# Altium PCB main.PcbDoc
Units mm, origin at the board's own origin, x right, y up, seen from the top; angles counter-clockwise.
Board outline 90.93 x 77.47 mm, 2 copper layers (Top Layer, Bottom Layer); 63 components, 63 nets, 252 pads, 106 vias.
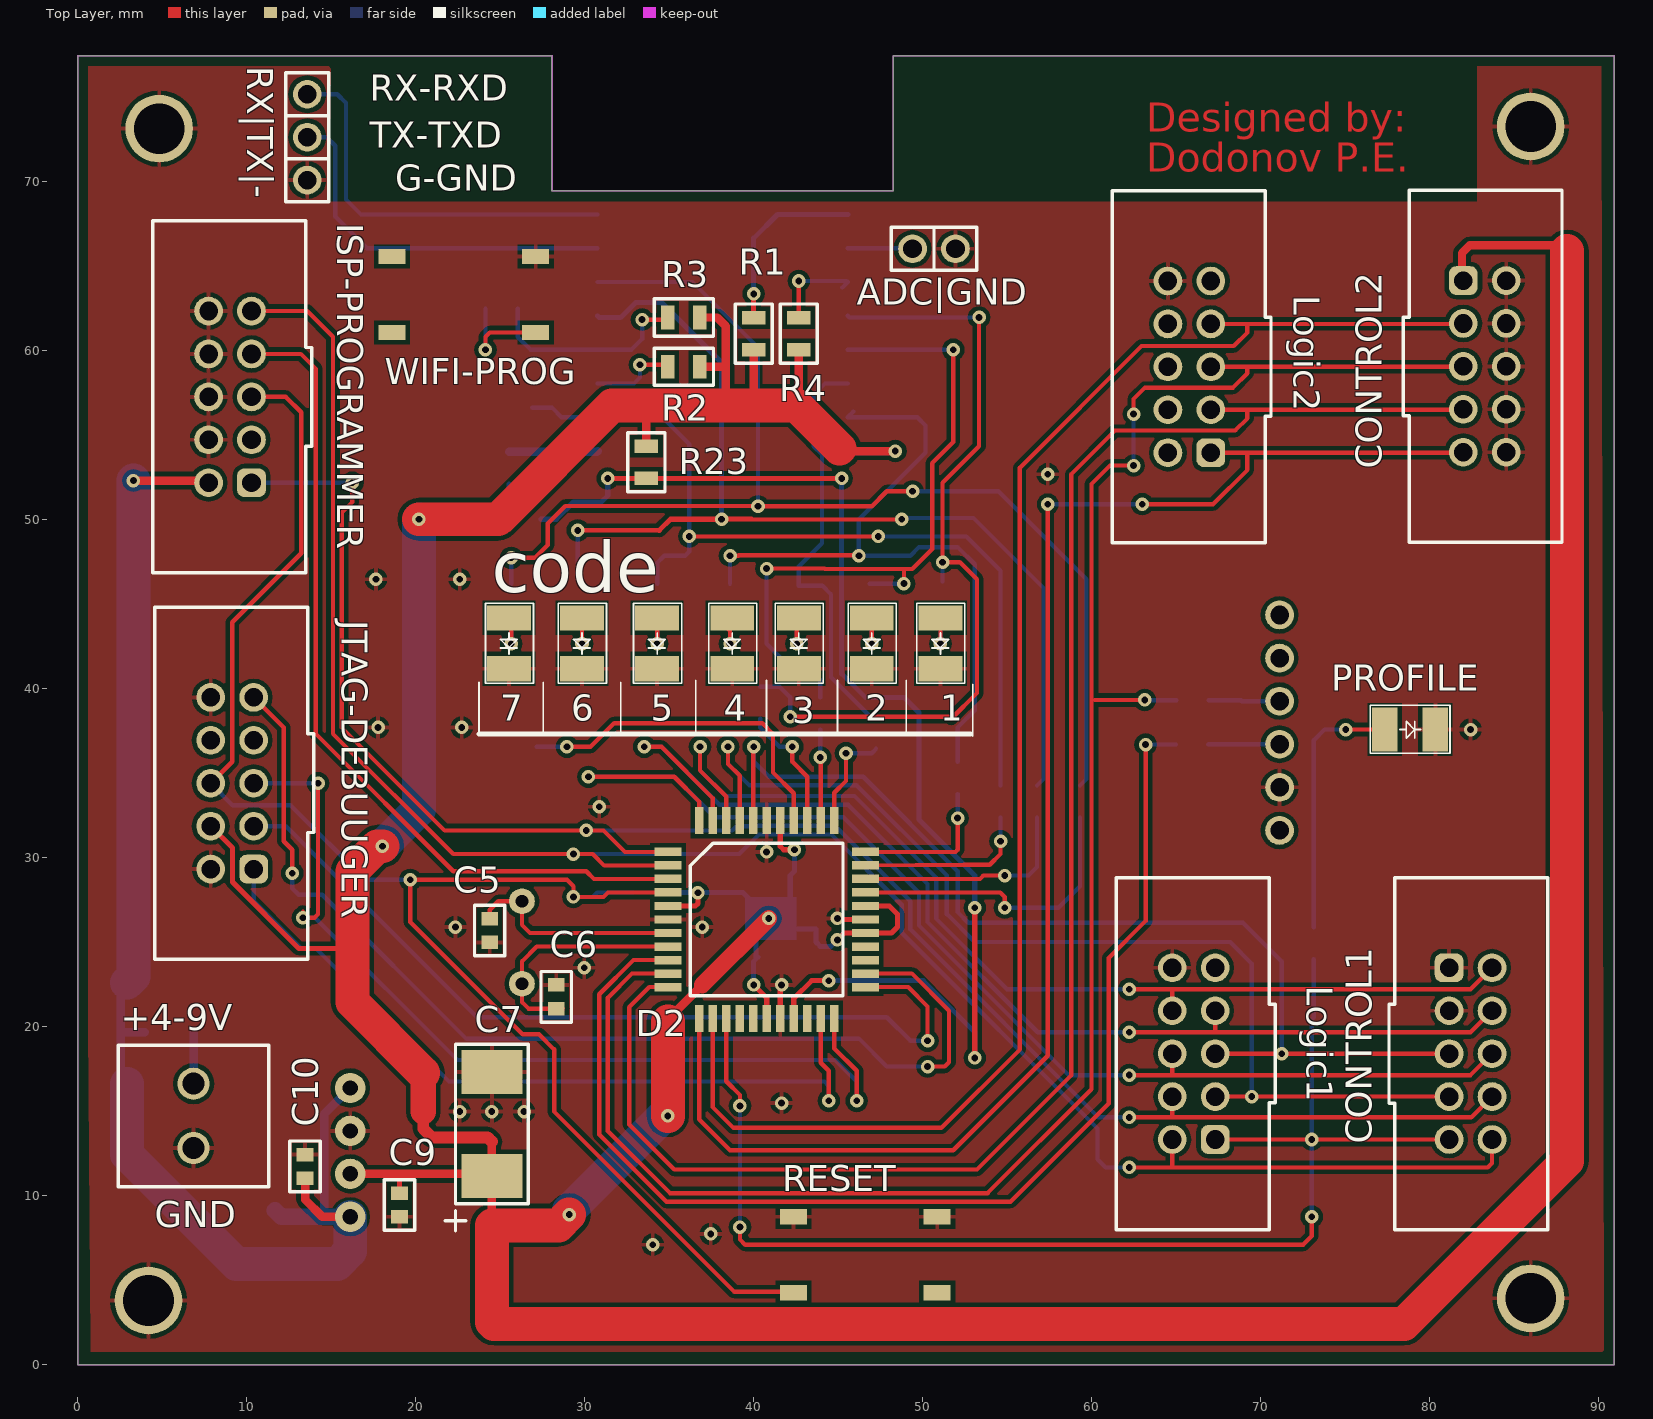
[diagram p0: Top Layer view]
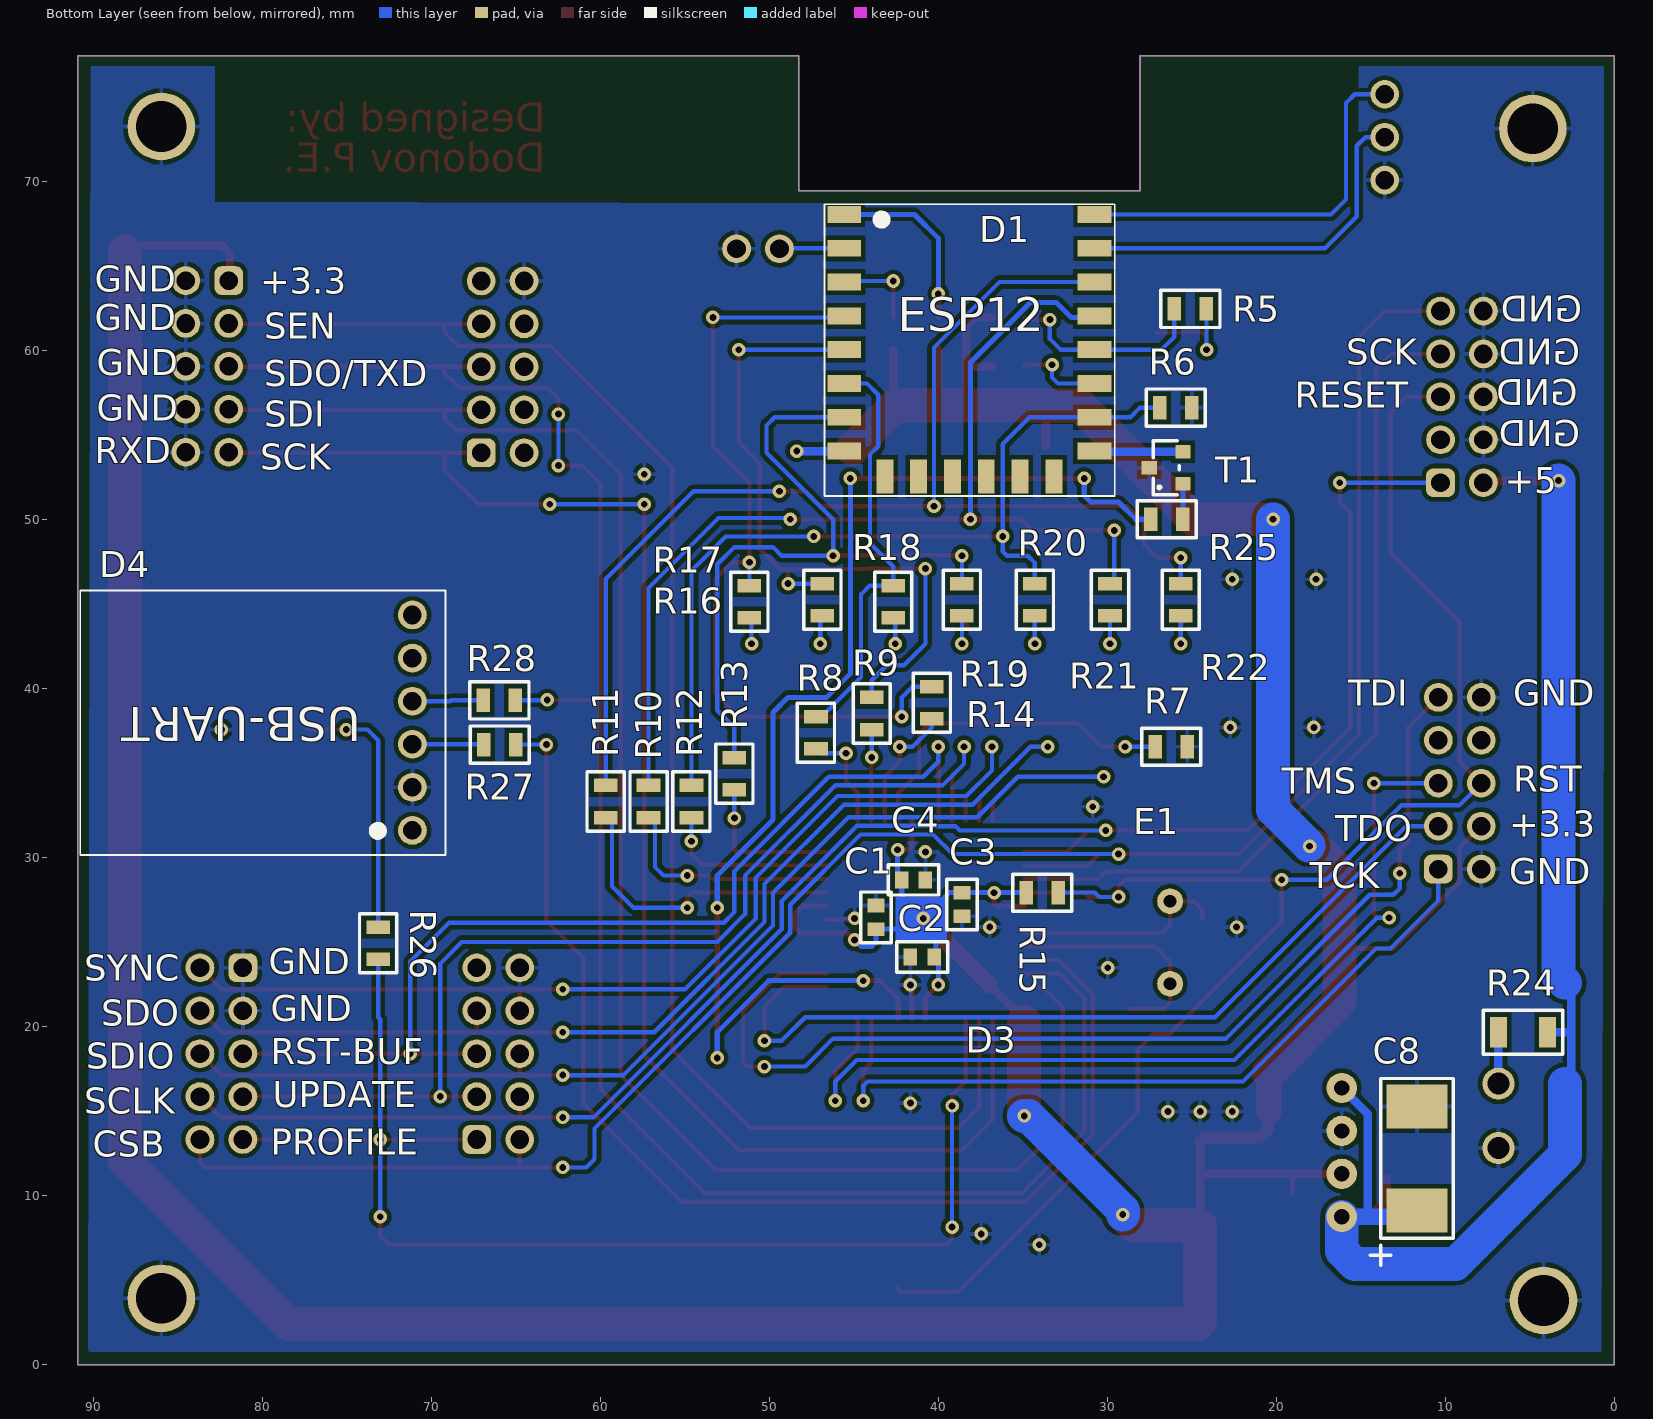
[diagram p1: Bottom Layer view, seen from below]
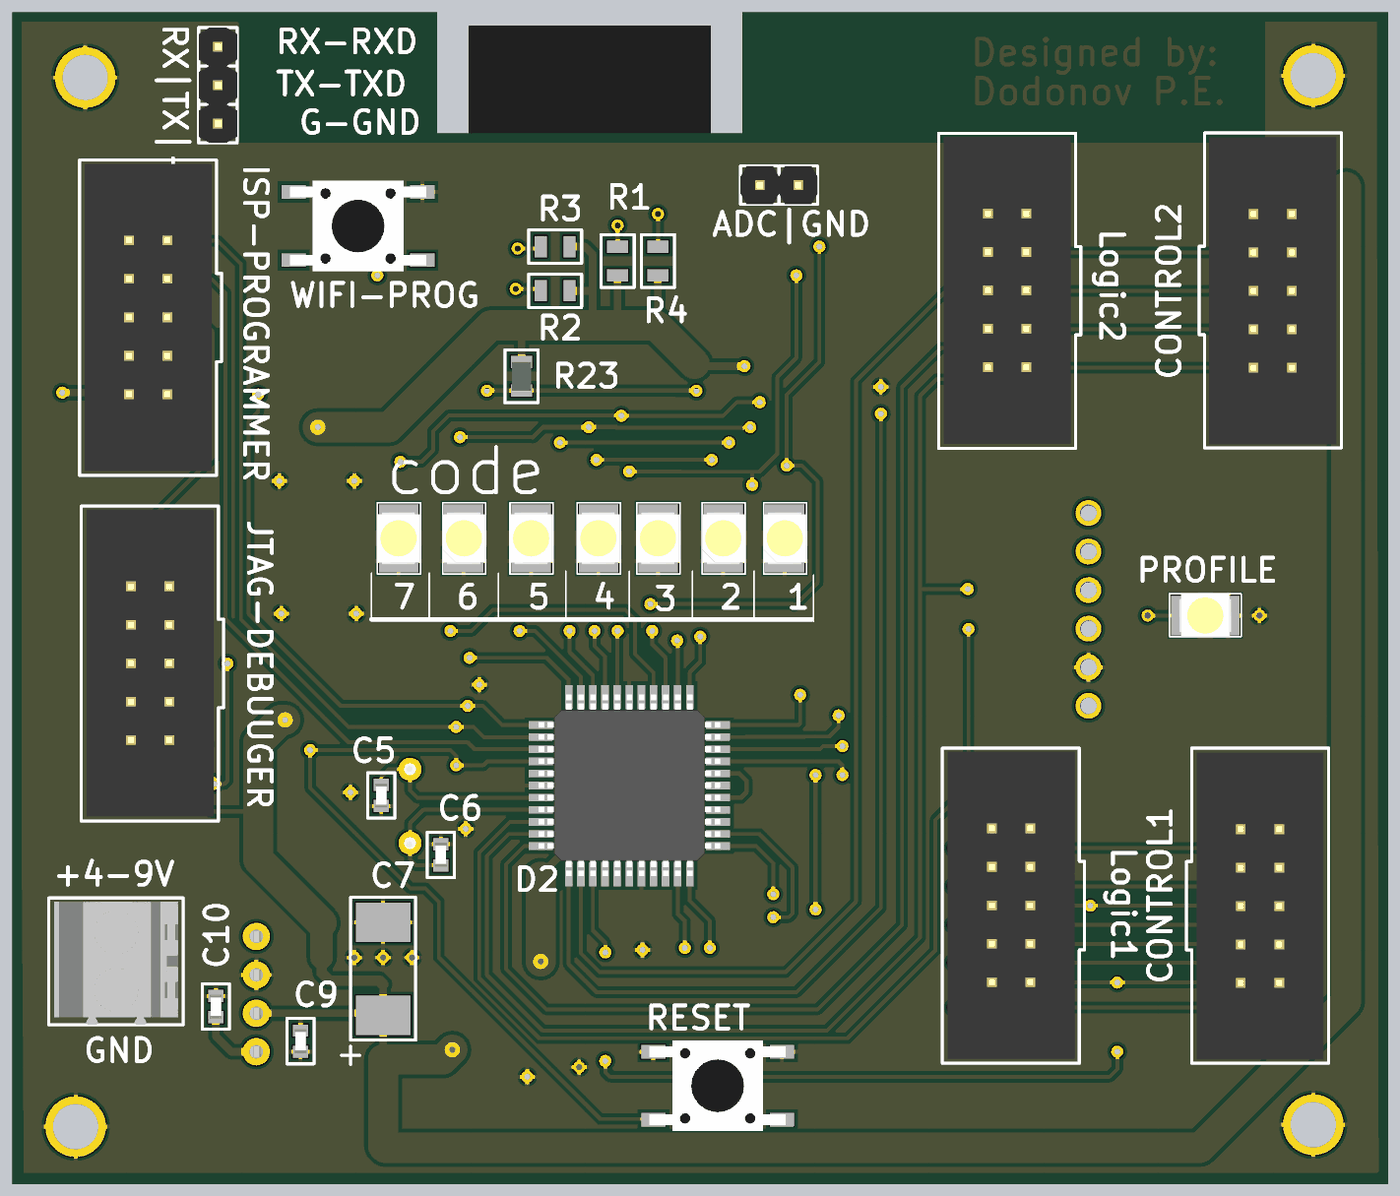
[diagram p2: 3D render of the assembled board from above, using the file's embedded part models]
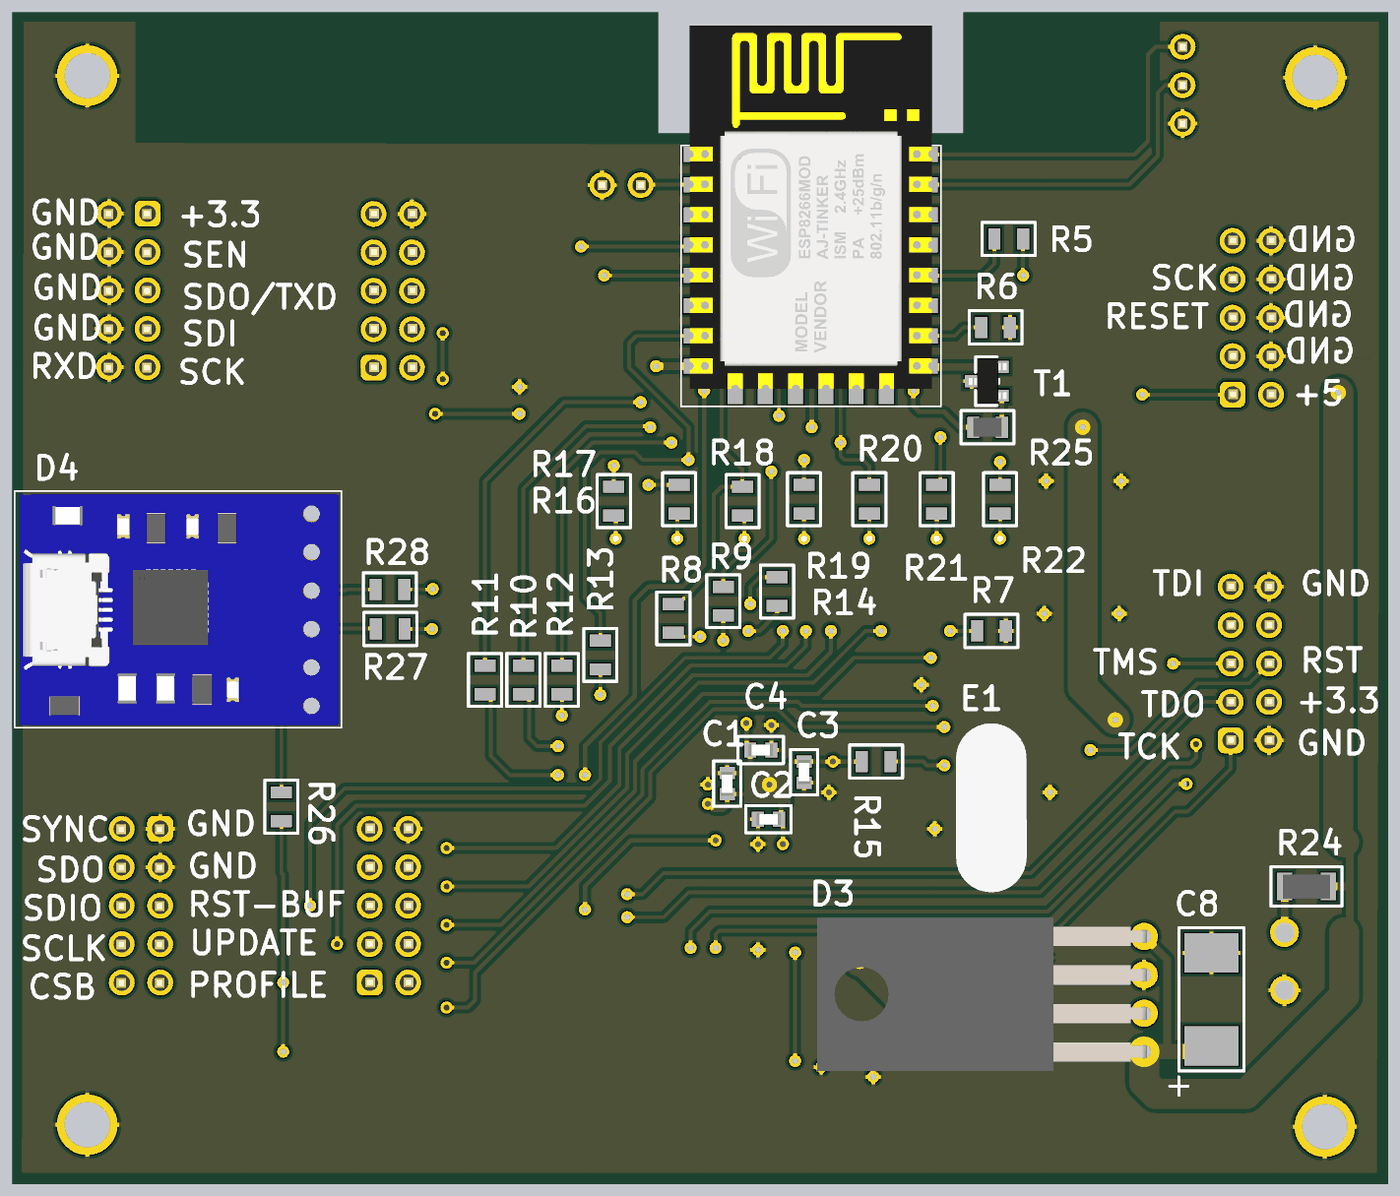
[diagram p3: 3D render of the assembled board from below, using the file's embedded part models]

## Layer stack, top to bottom
Top Solder: solder mask 0.0102, Solder Resist, Dk 3.5
Top Layer: signal copper 0.0356
Dielectric 1: dielectric 0.32, FR-4, Dk 4.8
Bottom Layer: signal copper 0.0356
Bottom Solder: solder mask 0.0102, Solder Resist, Dk 3.5

## Board outline
0,0 0,77.47 28.067,77.47 28.067,69.469 48.26,69.469 48.26,77.47 90.932,77.47 90.932,0

## Design rules (kind name [scope] priority, off if disabled: settings)
Clearance [All] p1: gap=0.254
HoleSize [All] p1: absolutevalues=TRUE maxlimit=6.3 minlimit=0.4 maxpercent=80.000 minpercent=20.000
PolygonConnect [All] p1: connectstyle=Relief reliefconductorwidth=0.254 reliefentries=4 polygonreliefangle="90 Angle" airgapwidth=0.254
RoomDefinition Светодиоды [InComponentClass('Светодиоды')] p1: confinementstyle=ConfineIn formatcopy=TRUE lockcomponents=FALSE outline 21.844,47.752 21.844,39.878 52.959,39.878 52.959,47.752
RoomDefinition Питание [InComponentClass('Питание')] p2: confinementstyle=ConfineIn formatcopy=TRUE lockcomponents=FALSE outline 1.524,6.985 36.703,6.985 36.703,21.59 1.524,21.59
RoomDefinition "Wifi модуль" [InComponentClass('Wifi модуль')] p3: confinementstyle=ConfineIn formatcopy=TRUE lockcomponents=FALSE outline 55.626,52.197 55.626,74.295 18.161,74.295 18.161,52.197
RoutingVias [All] p1: holewidth=0.4 width=0.8 viastyle="Through Hole" minholewidth=0.4 minwidth=0.8 maxholewidth=0.4 maxwidth=0.8
SolderMaskExpansion [All] p1: expansion=0.102
Width [All] p1: maxlimit=3 minlimit=0.254 preferedwidth=0.254
29 further rules are at their usual default settings.

## Classes and differential pairs
component class "Wifi модуль": - ADC D1 G4 G5 "PRESS FOR PROG" R1 R2 R3 R4 R5 R6 R23 R25 RX T1 WIFI-PROG X3
component class Контроллер: C1 C2 C3 C4 C5 C6 D2 E1 R7 R8 R9 R10 R11 R12 R13 R14 R15 RESET
component class Питание: +4-9V C7 C8 C9 C10 D3 R24
component class Разъемы: CONTROL1 CONTROL2 ISP-PROGRAMMER JTAG-DEBUUGER Logic1 Logic2 "Logic analyzer1" "Saleae logic analyzer" X?
component class Светодиоды: 1 2 3 4 5 6 7 PROFILE R16 R17 R18 R19 R20 R21 R22 R26 VD2
component class "Последовательный порт": D4 R27 R28

## Components (designator, comment, footprint, x,y, rotation, side; value= is the part's Value field where it differs from the comment)
1 "LED, 1210" PLCC4-1210 51.054,44.196 r270 top
2 "LED, 1210" PLCC4-1210 46.99,44.196 r270 top
3 "LED, 1210" PLCC4-1210 42.672,44.196 r270 top
4 "LED, 1210" PLCC4-1210 38.735,44.196 r270 top
5 "LED, 1210" PLCC4-1210 34.29,44.196 r270 top
6 "LED, 1210" PLCC4-1210 29.845,44.196 r270 top
7 "LED, 1210" PLCC4-1210 25.527,44.196 r270 top
+4-9V "" 284392-2_TE 6.858,12.827 r90 top
ADC|GND "РЮМК.430420.011ТУ" СНП346-2ВП21-1 51.943,66.04 r180 top (schematic designator ADC)
C1 "0603YC104KAT2A" 0603-AVX 43.688,25.781 r90 bottom
C2 "0603YC104KAT2A" 0603-AVX 41.656,24.13 r180 bottom
C3 "0603YC104KAT2A" 0603-AVX 38.608,26.543 r90 bottom
C4 "0603YC104KAT2A" 0603-AVX 40.767,28.702 r0 bottom
C5 "06035C103KAT4A" 0603-AVX 24.384,25 r90 top
C6 "06035C103KAT4A" 0603-AVX 28.321,22.479 r270 top
C7 "АЖЯР.673546.001ТУ" К53-56_ТИП5 24.511,11.176 r90 top
C8 "АЖЯР.673546.001ТУ" К53-56_ТИП5 11.684,9.144 r90 bottom
C9 "0603YC104KAT2A" 0603-AVX 19.05,8.763 r90 top
C10 "0603YC104KAT2A" 0603-AVX 13.462,12.446 r270 top
CONTROL1 "IDC10" IDC10MS 81.153,23.495 r270 top
CONTROL2 "IDC10" IDC10MS 81.991,64.16 r270 top
D1 "" ESP12-E 45.568,68.072 r180 bottom
D2 "" LQFP-44 34.925,30.353 r0 top
D3 "KA278R33" TO220-F-4L 16.129,8.763 r90 bottom
D4 "" USB-UART-CP2102 71.12,31.623 r0 bottom
E1 "10Mhz" HC49 26.289,27.432 r270 bottom
ISP-PROGRAMMER "IDC10" IDC10MS 10.287,52.197 r90 top
JTAG-DEBUUGER "IDC10" IDC10MS 10.414,29.337 r90 top
Logic1 "IDC10" IDC10MS 67.31,13.335 r90 top (schematic designator "Logic analyzer1")
Logic2 "IDC10" IDC10MS 67.056,53.975 r90 top (schematic designator "Logic analyzer2")
PROFILE "LED, 1210" PLCC4-1210 77.343,37.592 r0 top
R1 "ОЖ0.467.164ТУ" Р1-8МП-0,125 40.005,60.071 r90 top
R2 "ОЖ0.467.164ТУ" Р1-8МП-0,125 34.925,59.055 r0 top
R3 "ОЖ0.467.164ТУ" Р1-8МП-0,125 34.925,61.976 r0 top
R4 "ОЖ0.467.164ТУ" Р1-8МП-0,125 42.672,60.071 r90 top
R5 "ОЖ0.467.164ТУ" Р1-8МП-0,125 26.035,62.484 r180 bottom
R6 "ОЖ0.467.164ТУ" Р1-8МП-0,125 25,56.642 r0 bottom
R7 "ОЖ0.467.164ТУ" Р1-8МП-0,125 25.273,36.576 r0 bottom
R8 "ОЖ0.467.164ТУ" Р1-8МП-0,125 47.244,36.449 r90 bottom
R9 "ОЖ0.467.164ТУ" Р1-8МП-0,125 43.942,37.592 r90 bottom
R10 "ОЖ0.467.164ТУ" Р1-8МП-0,125 57.15,32.385 r90 bottom
R11 "ОЖ0.467.164ТУ" Р1-8МП-0,125 59.69,32.385 r90 bottom
R12 "ОЖ0.467.164ТУ" Р1-8МП-0,125 54.61,32.385 r90 bottom
R13 "ОЖ0.467.164ТУ" Р1-8МП-0,125 52.07,34.036 r90 bottom
R14 "ОЖ0.467.164ТУ" Р1-8МП-0,125 40.386,38.227 r90 bottom
R15 "ОЖ0.467.164ТУ" Р1-8МП-0,125 34.798,27.94 r180 bottom
R16 "ОЖ0.467.164ТУ" Р1-8МП-0,125 51.181,46.101 r270 bottom
R17 "ОЖ0.467.164ТУ" Р1-8МП-0,125 46.863,46.228 r270 bottom
R18 "ОЖ0.467.164ТУ" Р1-8МП-0,125 42.672,46.101 r270 bottom
R19 "ОЖ0.467.164ТУ" Р1-8МП-0,125 38.608,46.228 r270 bottom
R20 "ОЖ0.467.164ТУ" Р1-8МП-0,125 34.29,46.228 r270 bottom
R21 "ОЖ0.467.164ТУ" Р1-8МП-0,125 29.845,46.228 r270 bottom
R22 "ОЖ0.467.164ТУ" Р1-8МП-0,125 25.654,46.228 r270 bottom
R23 "АЛЯР.434110.005 ТУ" Р1-12-0,125 33.655,54.356 r270 top
R24 "АЛЯР.434110.005 ТУ" Р1-12-0,25 6.858,19.685 r180 bottom
R25 "АЛЯР.434110.005 ТУ" Р1-12-0,125 27.432,50.038 r180 bottom
R26 "ОЖ0.467.164ТУ" Р1-8МП-0,125 73.152,24.003 r90 bottom
R27 "Р1-8МП-0,125-1 кОм±1%-0,5-Л" Р1-8МП-0,125 64.999,36.703 r0 bottom
R28 "Р1-8МП-0,125-1 кОм±1%-0,5-Л" Р1-8МП-0,125 65.024,39.319 r0 bottom
RESET "Кнопка тактовая smd" "Кнопка тактовая smd" 42.164,8.763 r0 top
RX|TX|- "РЮМК.430420.011ТУ" СНП346-3ВП21-1 13.589,75.184 r270 top (schematic designator RX)
T1 "" SOT23 25.527,52.578 r90 bottom
WIFI-PROG "Кнопка тактовая smd" "Кнопка тактовая smd" 27.305,61.087 r180 top

## Footprints (in the part's own frame and the unit in brackets; to place one, negate y for a bottom-side part, rotate by r counter-clockwise, add the part's x,y. Pads: shape width x height; smd on the part's side, far side on the other; paste and mask are expansions set on the pad)
0603-AVX [mm]
  rect 0.8x1 smd mask+0.1: 1(0,0) 2(1.4,0)
  silkscreen extent -0.8,-0.9 2.2,0.9, body extent -0.1,-0.4 1.5,0.4, height 0.7
284392-2_TE [mm]
  round 1.9 hole 1.3 mask+0.1: 1(0,0) 2(3.81,0)
  silkscreen extent -2.29,-4.44 6.1,4.45, body extent -2.28,-4.11 5.84,4.09, height 12.6
ESP12-E [mm]
  rect 2x1 smd: 1(-0.002,0) 2(-0.002,-2) 3(-0.002,-4) 4(-0.002,-6) 5(-0.002,-8) 6(-0.002,-10) 7(-0.002,-12) 8(-0.002,-14) 15(14.802,-14) 16(14.802,-12) 17(14.802,-10) 18(14.802,-8) 19(14.802,-6) 20(14.802,-4) 21(14.802,-2) 22(14.802,0)
  rect 1x2 smd: 9(2.4,-15.5) 10(4.4,-15.5) 11(6.4,-15.5) 12(8.4,-15.5) 13(10.4,-15.5) 14(12.4,-15.5)
  silkscreen extent -1.17,-16.66 16,0.6, body extent -0.59,-15.48 15.42,8.52, height 2.65
HC49 [mil]
  round 60 hole 30: 1(0,0) 2(192.13,0)
  body extent -120,-90 320,94, height 143
IDC10MS [mm]
  rrect50% 1.7x1.7 hole 1.1 mask+0.1: 1(0,0)
  round 1.7 hole 1.1 mask+0.1: 2(0,2.54) 3(2.54,0) 4(2.54,2.54) 5(5.08,0) 6(5.08,2.54) 7(7.62,0) 8(7.62,2.54)
  round 1.7 hole 1.1: 9(10.16,0) 10(10.16,2.54)
  silkscreen extent -5.33,-3.56 15.49,5.84, body extent -5.04,-2.9 15.26,5.5, height 9.3
LQFP-44 [mm]
  rect 1.6x0.5 smd mask+0: 1(0,0) 2(0,-0.8) 3(0,-1.6) 4(0,-2.4) 5(0,-3.2) 6(0,-4) 7(0,-4.8) 8(0,-5.6) 9(0,-6.4) 10(0,-7.2) 11(0,-8) 23(11.7,-8) 24(11.7,-7.2) 25(11.7,-6.4) 26(11.7,-5.6) 27(11.7,-4.8) 28(11.7,-4) 29(11.7,-3.2) 30(11.7,-2.4) 31(11.7,-1.6) 32(11.7,-0.8) 33(11.7,0)
  rect 0.5x1.6 smd mask+0: 12(1.85,-9.85) 13(2.65,-9.85) 14(3.45,-9.85) 15(4.25,-9.85) 16(5.05,-9.85) 17(5.85,-9.85) 18(6.65,-9.85) 19(7.45,-9.85) 20(8.25,-9.85) 21(9.05,-9.85) 22(9.85,-9.85) 34(9.85,1.85) 35(9.05,1.85) 36(8.25,1.85) 37(7.45,1.85) 38(6.65,1.85) 39(5.85,1.85) 40(5.05,1.85) 41(4.25,1.85) 42(3.45,1.85) 43(2.65,1.85) 44(1.85,1.85)
  silkscreen extent 1.33,-8.52 10.37,0.52, body extent -0.14,-9.99 11.86,2.01, height 1.1
PLCC4-1210 [mm]
  rect 1.5x2.6 smd mask+0.1: 1(0,0) 2(3,0)
  silkscreen extent -0.86,-1.4 3.86,1.45, body extent -0.25,-1.4 3.25,1.4, height 1.86
SOT23 [mm]
  rect 0.8x0.9 smd mask+0.1: 1(-0.45,0) 2(1.45,0) 3(0.5,2)
  silkscreen extent -1.1,0.23 2.1,1.75, body extent -1,-0.3 2,2.2, height 1.06
TO220-F-4L [mm]
  round 1.8 hole 0.9: 1(0,0) 2(2.54,0) 3(5.08,0) 4(7.62,0)
  body extent -1.28,-0.18 8.88,21.6, height 3.81
USB-UART-CP2102 [mm]
  round 1.7 hole 1.1: 1(0,0) 2(0,-2.55) 3(0,-5.1) 4(0,-7.65) 5(0,-10.2) 6(0,-12.75)
  silkscreen extent -1.95,-14.2 19.65,1.45, body extent -1.75,-13.97 19.33,1.27, height 3.24
К53-56_ТИП5 [mm]
  rect 2.6x3.6 smd mask+0.1: 1(0,0) 2(6.15,0)
  silkscreen extent -3.25,-2.15 7.8,2.75, body extent -0.5,-2.25 6.6,2.25, height 4
"Кнопка тактовая smd" [mm]
  rect 1.6x0.9 smd mask+0.1: 1(0.2,0)
  rect 1.6x0.9 smd mask+0.05: 2(8.7,0) 3(0.2,-4.5) 4(8.7,-4.5)
  body extent -0.05,-5.25 8.95,0.75, height 4.3
Р1-8МП-0,125 [mm]
  rect 0.8x1.4 smd mask+0.1: 1(0,0) 2(1.9,0)
  silkscreen extent -0.8,-1.1 2.7,1.1, body extent -0.05,-0.62 1.95,0.63, height 0.4
Р1-12-0,25 [mm]
  rect 1x1.8 smd mask+0.1: 1(0,0) 2(2.9,0)
  silkscreen extent -0.9,-1.3 3.8,1.3, body extent -0.15,-0.8 3.05,0.8, height 0.6
Р1-12-0,125 [mm]
  rect 0.8x1.4 smd mask+0.1: 1(0,0) 2(1.9,0)
  silkscreen extent -0.8,-1.1 2.7,1.1, body extent -0.05,-0.63 1.95,0.63, height 0.4
СНП346-2ВП21-1 [mm]
  round 1.7 hole 1.1 mask+0.1: 1(0,0) 2(2.54,0)
  silkscreen extent -1.27,-1.27 3.81,1.27, body extent -1.27,-1.27 3.81,1.27, height 8.8
СНП346-3ВП21-1 [mm]
  round 1.7 hole 1.1 mask+0.1: 1(0,0) 2(2.54,0) 3(5.08,0)
  silkscreen extent -1.27,-1.27 6.35,1.27, body extent -1.27,-1.27 6.35,1.27, height 8.8

## Part data
1 2 3 4 5 6 7 PROFILE: library part "1210 LED"
+4-9V: library part "Клемник 3.81х2 TE"
ADC|GND: library part СНП346-2ВП21-1
C1 C2 C3 C4 C9 C10: library part 0603-X7R-0,1мкФ-16В-10%
C5 C6: library part 0603-X7R-0,01мкФ-50В-10%
C7 C8: library part "ОСМ К53-56А-16В-100"
CONTROL1: library part AD9914_CONTROL
CONTROL2: library part HMC835_CONTROL
D1: library part ESP12-E
D2: library part ATmega16, "AVR 8-bit microcontroller"
D4: library part USB-UART
E1: library part "Crystal oscillator 16Mhz"
ISP-PROGRAMMER: library part AVR-ISP
JTAG-DEBUUGER: library part JTAG_ICE-10
Logic1 Logic2: library part Saleae_logic_analyzer
R1 R2 R3 R4 R5 R6 R7 R8 R9 R10 R11 R12 R13 R14 R15 R16 R17 R18 R19 R20 R21 R22 R26: library part "Р1-8МП-0,125-100 Ом±1%"
R23: library part "Р1-12-0,125-1,5 кОм±1%"
R24: library part "Р1-12-0,25-0,75 Ом±5%"
R25: library part "Р1-12-0,125-200 Ом±5%"
R27 R28: library part "Р1-8МП-0,125-1 кОм±1%"
RX|TX|-: library part СНП346-3ВП21-1
T1: library part IRLML2502

## Free pads (board coordinates)
  round 4 hole 3: 2(4.191,3.81) 2(4.826,73.152) 2(85.979,3.937) 2(85.979,73.279)

## Via types
v1: diameter 0.8, hole 0.4, Top Layer to Bottom Layer, 106 vias

## Nets (pads, with @x,y where several pads share a name; then routed paths per layer and width w, separated by ;. In a path a pad name is that pad's centre, name@x,y a point inside that pad or via, vN(x,y) a via of type N, cw(c..) or ccw(c..) an arc to the next point about the centre after c; other vN are vias at no path point)
1: WIFI-PROG.2
3: WIFI-PROG.4
+3.3V: C1.1 C2.2 C3.2 C4.2 C7.1 C9.2 CONTROL2.1 D1.8 D2.5 D2.17 D2.27 D2.29 D2.38 D3.2 JTAG-DEBUUGER.4 R1.1 R2.2 R3.2 R4.1 R15.1 R23.1 | length 320.5
  Top Layer w0.3: JTAG-DEBUUGER.4 9.16,30.591 9.16,28.569 13.091,24.638 16.256,24.638 ; C9.2 19.05,11.303 ; D2.5 36.551,27.153 36.703,27.305 v1(36.703,27.94) ; v1(40.005,22.479) 40.775,21.709 D2.17 ; D2.38 41.575,30.688 41.783,30.48 v1(42.418,30.48) ; v1(44.958,25.146) 45.365,25.553 D2.27 48.159,25.553 48.514,25.908 48.514,26.67 48.031,27.153 D2.29
  Top Layer w0.5: D3.2 19.05,11.303 24.384,11.303 C7.1 ; 24.511,8.255 C7.1 ; 24.511,13.208 C7.1 ; R23.1 33.655,56.769 ; 34.925,20.32 34.925,20.447 36.957,22.479 ; 36.703,56.769 36.825,56.891 ; R2.2 38.354,59.055 ; R3.2 37.846,61.976 38.354,61.468 38.354,59.055 ; 38.354,56.769 38.354,59.055 ; 40.005,56.769 R1.1 ; 42.545,56.769 42.672,56.896 R4.1 ; 45.085,54.229 45.242,54.072 v1(48.387,54.072) ; CONTROL2.1@81.915,64.135 81.915,65.786 82.368,66.239 87.812,66.239
  Top Layer w0.7: 20.447,14.986 20.447,13.97 20.955,13.462 24.257,13.462 24.511,13.208
  Top Layer w1: 36.957,22.479 v1(40.894,26.416)
  Top Layer w1.5: 20.447,14.986 20.447,17.272
  Top Layer w2: 16.256,24.638 16.256,21.463 20.447,17.272 ; 16.256,24.892 16.256,29.21 17.738,30.692 v1(18.034,30.692) ; v1(20.193,50.038) 24.892,50.038 31.623,56.769 33.655,56.769 36.703,56.769 38.354,56.769 40.005,56.769 42.545,56.769 45.085,54.229 ; v1(29.083,8.89) 28.448,8.255 24.511,8.255 24.511,2.54 24.638,2.413 78.486,2.413 88.138,12.065 88.138,65.913 ; v1(34.925,14.732) 34.925,20.32
  Bottom Layer w0.3: R15.1 v1(36.703,27.94) 38.478,27.94 38.481,27.943 C3.2 39.367,27.943 v1(40.894,26.416) ; v1(40.005,22.479) 40.005,23.879 C2.2@40.129,24.003 ; C2.2 C2.2@40.129,24.003 ; v1(42.418,30.48) 42.418,29.207 42.167,28.956 C4.2 42.167,27.689 v1(40.894,26.416) ; v1(44.958,25.146) 44.577,24.765 43.942,24.765 43.688,25.019 C1.1 41.529,25.781 v1(40.894,26.416) ; C2.2@40.129,24.003 40.129,25.651 v1(40.894,26.416)
  Bottom Layer w0.5: D1.8@45.568,54.072 D1.8 v1(48.387,54.072)
  Bottom Layer w2: v1@18.079,30.737 20.193,32.851 v1(20.193,50.038) ; v1(29.083,8.89) 29.083,9.144 34.671,14.732 v1(34.925,14.732)
+5V: C8.1 C10.2 D3.1 D3.4 ISP-PROGRAMMER.2 R24.2 | length 82.9
  Top Layer w0.5: v1(3.302,52.324) 7.62,52.324 ISP-PROGRAMMER.2 ISP-PROGRAMMER.2@7.366,51.816 ; C10.2 13.462,9.779 14.478,8.763 D3.1
  Bottom Layer w0.5: 2.921,16.637 2.54,17.018 2.54,19.685 ; 2.921,22.606 2.54,22.225 2.54,19.685 ; R24.2 2.54,19.685 ; 14.605,8.763 14.605,14.859 D3.4 D3.4@16.764,16.383
  Bottom Layer w1: C8.1 12.065,8.763 14.605,8.763 D3.1
  Bottom Layer w2: 2.921,16.637 2.921,12.446 9.398,5.969 15.367,5.969 16.129,6.731 D3.1 ; 2.921,22.606 3.302,22.987 v1(3.302,52.324)
AD9914-CSB-BUF: CONTROL1.10 D2.2 ISP-PROGRAMMER.9 Logic1.2 | length 120.2
  Top Layer w0.254: ISP-PROGRAMMER.9 13.589,62.357 15.113,60.833 15.113,37.338 22.225,30.226 v1(29.337,30.226) 30.48,30.226 31.153,29.553 D2.2 ; v1(62.23,11.684) 64.77,11.684 ; Logic1.2 64.77,11.684 ; CONTROL1.10 83.693,11.938 83.439,11.684 64.77,11.684
  Bottom Layer w0.254: v1(29.337,30.226) 39.154,30.226 40.317,31.388 44.602,31.388 48.768,27.222 48.768,25.571 60.347,13.992 60.347,12.17 60.833,11.684 v1(62.23,11.684)
AD9914-IO-UPDATE: CONTROL1.7 D2.41 Logic1.3 | length 64.6
  Top Layer w0.254: v1(38.481,36.576) 38.481,35.56 39.175,34.866 D2.41 ; Logic1.3 v1(69.469,15.875) CONTROL1.7
  Bottom Layer w0.254: v1(38.481,36.576) 38.481,35.56 39.751,34.29 46.101,34.29 51.435,28.956 51.435,26.67 53.086,25.019 68.199,25.019 69.469,23.749 v1(69.469,15.875)
AD9914-PROFILE-SELECT-0: CONTROL1.9 D2.14 Logic1.1 R26.1 | length 78.1
  Top Layer w0.254: D2.14 38.375,16.785 39.193,15.967 v1(39.193,15.323) ; v1(39.193,8.154) 39.193,7.416 39.497,7.112 72.517,7.112 73.025,7.62 v1(73.025,8.763) v1@72.975,8.813 ; Logic1.1 v1(73.025,13.335) CONTROL1.9
  Bottom Layer w0.254: v1(39.193,8.154) v1(39.193,15.323) ; v1(73.025,8.763) v1(73.025,13.335) 73.025,20.447 73.152,20.574 R26.1 ; CONTROL1.9@81.026,13.208 CONTROL1.9
AD9914-RESET-BUF: CONTROL1.5 D2.40 Logic1.5 | length 62.1
  Top Layer w0.254: D2.40 39.975,36.546 v1(40.005,36.576) ; Logic1.5 v1(71.247,18.415) CONTROL1.5
  Bottom Layer w0.254: v1(40.005,36.576) 40.005,35.687 40.894,34.798 46.482,34.798 52.07,29.21 52.07,26.797 52.705,26.162 68.961,26.162 71.247,23.876 v1(71.247,18.415)
AD9914-SCLK-BUF: CONTROL1.8 D2.1 ISP-PROGRAMMER.1 Logic1.4 | length 107
  Top Layer w0.254: v1(16.256,52.197) 16.256,51.054 15.621,50.419 15.621,37.719 21.717,31.623 v1(30.099,31.623) 31.115,31.623 32.385,30.353 D2.1 ; v1(62.23,14.644) 64.77,14.644 ; Logic1.4 64.77,14.644 ; CONTROL1.8 82.462,14.644 64.77,14.644
  Bottom Layer w0.254: ISP-PROGRAMMER.1 10.414,52.324 10.541,52.197 v1(16.256,52.197) ; v1@30.27,31.794 v1(30.099,31.623) 38.735,31.623 38.989,31.877 40.087,31.877 40.106,31.896 44.812,31.896 49.276,27.432 49.276,25.781 60.413,14.644 v1(62.23,14.644)
AD9914-SDIO: CONTROL1.6 D2.44 Logic1.6 | length 72
  Top Layer w0.254: v1(30.226,34.798) 35.306,34.798 36.775,33.329 D2.44 ; v1(62.23,17.145) 64.77,17.145 ; Logic1.6 64.77,17.145 ; CONTROL1.6 82.423,17.145 64.77,17.145
  Bottom Layer w0.254: v1(30.226,34.798) 35.306,34.798 37.7,32.404 45.32,32.404 49.784,27.94 49.784,25.995 58.634,17.145 v1(62.23,17.145)
AD9914-SDO: CONTROL1.4 D2.43 Logic1.7 | length 66.9
  Top Layer w0.254: v1(33.528,36.576) 34.544,36.576 37.575,33.545 D2.43 ; v1(62.23,19.685) 67.31,19.685 ; Logic1.7 67.31,19.685 ; CONTROL1.4 82.423,19.685 67.31,19.685
  Bottom Layer w0.254: v1(33.528,36.576) 34.544,36.576 37.973,33.147 45.593,33.147 50.292,28.448 50.292,26.206 56.813,19.685 v1(62.23,19.685)
AD9914-SYNC-IO-BUF: CONTROL1.2 D2.42 Logic1.8 | length 62
  Top Layer w0.254: v1(36.83,36.576) 36.83,35.179 38.375,33.634 D2.42 D2.42@38.481,32.309 ; v1(62.23,22.225) 64.77,22.225 ; Logic1.8 64.77,22.225 ; CONTROL1.2 82.423,22.225 64.77,22.225
  Bottom Layer w0.254: v1(36.83,36.576) 36.83,35.179 38.354,33.655 45.974,33.655 50.8,28.829 50.8,26.416 54.991,22.225 v1(62.23,22.225)
ESP8266-GATE: D2.19 R23.2 R25.1 | length 73.4
  Top Layer w0.3: v1(31.369,52.451) 31.374,52.456 R23.2 43.81,52.456 43.815,52.451 v1(45.212,52.451) ; D2.19 42.375,21.674 43.434,22.733 v1(44.45,22.733) ; v1(53.086,18.161) v1(53.086,27.051)
  Bottom Layer w0.3: R25.1 28.321,50.038 29.337,51.054 30.988,51.054 31.369,51.435 v1(31.369,52.451) ; v1(44.45,22.733) 50.038,22.733 53.086,19.685 v1(53.086,18.161) ; v1(45.212,52.451) 45.212,40.894 46.609,39.497 48.895,39.497 49.784,38.608 49.784,32.258 53.086,28.956 v1(53.086,27.051)
GND: 1.2 2.2 3.2 4.2 5.2 6.2 7.2 +4-9V.1 ADC|GND.1 C1.2 C2.1 C3.1 C4.1 C5.1 C6.1 C7.2 C8.2 C9.1 C10.1 CONTROL1.1 CONTROL1.3 CONTROL2.2 CONTROL2.4 CONTROL2.6 CONTROL2.8 CONTROL2.10 D2.6 D2.18 D2.28 D2.39 D3.3 D4.2 ISP-PROGRAMMER.4 ISP-PROGRAMMER.6 ISP-PROGRAMMER.8 ISP-PROGRAMMER.10 JTAG-DEBUUGER.2 JTAG-DEBUUGER.10 Logic1.10 Logic2.10 pad.2 PROFILE.2 R6.1 R7.1 RESET.1 RESET.2 RX|TX|-.3 T1.3 WIFI-PROG.3 | length 4.2
  Top Layer w0.3: D2.18 41.575,22.398 v1(41.656,22.479) ; v1@45.021,26.353 D2.28
  Top Layer w0.5: v1(44.958,26.416) v1@45.021,26.353
  Top Layer w0.7: D3.3 D3.3@16.51,14.224
  other v1: 34.036,7.112 37.465,7.747 22.606,14.986 24.511,14.986 26.416,14.986 41.656,15.494 29.972,23.495 22.352,25.908 36.957,25.908 40.767,30.353 30.861,33.02 82.423,37.592 17.78,37.719 22.733,37.719 17.653,46.482 22.606,46.482 57.404,52.705
HMC835-SCK: CONTROL2.9 D2.12 Logic2.1 | length 90.8
  Top Layer w0.254: D2.12 36.775,14.533 38.608,12.7 51.816,12.7 57.404,18.288 v1(57.404,50.927) ; v1(62.992,50.927) 67.183,50.927 69.215,52.959 69.215,53.975 ; Logic2.1 69.215,53.975 ; CONTROL2.9@81.915,53.975 69.215,53.975
  Bottom Layer w0.254: v1(57.404,50.927) v1(62.992,50.927)
HMC835-SDI: CONTROL2.7 D2.11 Logic2.3 | length 102.2
  Top Layer w0.254: D2.11 D2.11 33.824,22.353 32.639,21.168 32.639,14.224 35.306,11.557 53.213,11.557 58.801,17.145 58.801,52.705 61.38,55.284 68.492,55.284 69.215,56.007 69.215,56.515 ; Logic2.3 69.215,56.515 ; Logic2.3@67.183,57.023 Logic2.3@67.31,56.896 ; CONTROL2.7@81.915,56.515 69.215,56.515
HMC835-SDO: CONTROL2.5 D2.10 Logic2.5 R28.1 | length 114.9
  Top Layer w0.254: D2.10 32.807,23.153 31.369,21.715 31.369,13.843 35.052,10.16 53.848,10.16 59.995,16.307 59.995,52.121 61.087,53.213 v1(62.484,53.213) ; 60.198,39.345 v1(63.144,39.345) ; v1(62.484,56.261) 62.484,57.15 63.158,57.824 68.365,57.824 69.215,58.674 69.215,59.055 ; Logic2.5 69.215,59.055 ; CONTROL2.5@81.915,59.055 69.215,59.055
  Bottom Layer w0.254: v1(62.484,53.213) v1(62.484,56.261) ; v1(63.144,39.345) 63.17,39.319 R28.1
HMC835-SEN: CONTROL2.3 D2.13 Logic2.7 | length 92.4
  Top Layer w0.254: D2.13 37.573,20.501 37.573,15.259 38.81,14.022 51.106,14.022 55.753,18.669 55.753,53.086 62.953,60.286 68.414,60.286 69.215,61.087 69.215,61.595 ; Logic2.7 69.215,61.595 ; CONTROL2.3@81.915,61.595 69.215,61.595
ISP-SCK: D2.3 ISP-PROGRAMMER.7 | length 50.2
  Top Layer w0.254: ISP-PROGRAMMER.7 13.208,59.817 14.097,58.928 14.097,37.338 22.225,29.21 30.099,29.21 30.556,28.753 D2.3
JTAG-RESET: D2.4 ISP-PROGRAMMER.5 JTAG-DEBUUGER.6 R15.2 RESET.3 | length 98.1
  Top Layer w0.254: JTAG-DEBUUGER.6 9.144,35.687 9.144,43.942 13.231,48.029 13.231,56.365 12.319,57.277 ISP-PROGRAMMER.5 ; D2.4 31.382,27.953 31.115,27.686 v1(29.337,27.686) 29.337,28.321 28.956,28.702 v1(19.685,28.702) 19.685,26.206 26.333,19.558 27.305,19.558 28.194,18.669 28.194,14.986 38.862,4.318 42.227,4.318 RESET.3@42.481,4.572
  Bottom Layer w0.254: JTAG-DEBUUGER.6 9.183,33.108 12.612,33.108 17.018,28.702 v1(19.685,28.702) ; v1(29.337,27.686) 30.48,27.686 30.747,27.953 R15.2@32.885,27.953
JTAG-TCK: D2.21 JTAG-DEBUUGER.1 | length 46.4
  Top Layer w0.254: D2.21 43.975,17.874 44.45,17.399 v1(44.45,15.621)
  Bottom Layer w0.254: JTAG-DEBUUGER.1 10.414,27.473 13.249,24.638 14.097,24.638 21.971,16.764 44.196,16.764 44.45,16.51 v1(44.45,15.621)
JTAG-TDI: D2.24 JTAG-DEBUUGER.9 | length 64.3
  Top Layer w0.254: JTAG-DEBUUGER.9@10.541,39.37 12.192,37.719 12.192,30.988 12.7,30.48 v1(12.7,29.083) ; D2.24 49.364,23.153 51.562,20.955 51.562,17.907 51.308,17.653 v1(50.292,17.653)
  Bottom Layer w0.254: v1(12.7,29.083) 12.7,28.194 13.081,27.813 14.478,27.813 22.987,19.304 46.228,19.304 47.879,17.653 v1(50.292,17.653)
JTAG-TDO: D2.23 JTAG-DEBUUGER.3 | length 51.3
  Top Layer w0.254: D2.23 49.148,22.353 50.292,21.209 v1(50.292,19.177)
  Bottom Layer w0.254: JTAG-DEBUUGER.3 12.319,31.877 23.622,20.574 47.879,20.574 49.276,19.177 v1(50.292,19.177)
JTAG-TMS: D2.22 JTAG-DEBUUGER.5 | length 56.5
  Top Layer w0.254: v1@13.333,26.819 v1(13.333,26.46) 14.014,26.46 14.224,26.67 v1(14.224,34.417) v1@14.199,34.392 ; D2.22 44.775,18.725 46.101,17.399 v1(46.101,15.621)
  Bottom Layer w0.254: JTAG-DEBUUGER.5@10.541,34.29 JTAG-DEBUUGER.5 v1(14.224,34.417) ; v1(13.333,26.46) 14.053,26.46 22.479,18.034 44.831,18.034 46.101,16.764 v1(46.101,15.621)
Net1_1: 1.1 R16.2 | length 3.1
  Top Layer w0.254: v1(51.054,42.672) 1.1
  Bottom Layer w0.254: v1(51.054,42.672) R16.2@51.054,44.201
Net2_1: 2.1 R17.2 | length 3.2
  Top Layer w0.254: v1(46.99,42.672) 2.1
  Bottom Layer w0.254: R17.2 46.99,44.201 v1(46.99,42.672)
Net3_1: 3.1 R18.2 | length 3.2
  Top Layer w0.254: v1(42.545,42.672) 42.545,44.069 3.1
  Bottom Layer w0.254: v1(42.545,42.672) 42.545,44.074 R18.2
Net4_1: 4.1 R19.2 | length 3.5
  Top Layer w0.254: v1(38.608,42.672) 38.608,43.421 38.284,43.745 4.1
  Bottom Layer w0.254: v1@38.608,42.664 v1(38.608,42.672) R19.2
Net5_1: 5.1 R20.2 | length 3.2
  Top Layer w0.254: v1(34.29,42.672) 5.1
  Bottom Layer w0.254: v1(34.29,42.672) R20.2
Net6_1: 6.1 R21.2 | length 3.2
  Top Layer w0.254: v1(29.845,42.672) 6.1
  Bottom Layer w0.254: v1(29.845,42.672) R21.2
Net7_1: 7.1 R22.2 | length 3.3
  Top Layer w0.254: 7.1@25.273,44.196 25.654,43.815 v1(25.654,42.672)
  Bottom Layer w0.254: v1(25.654,42.672) R22.2
Net+4-9V_2: +4-9V.2 R24.1 | length 3
  Bottom Layer w0.5: +4-9V.2 R24.1
NetADC: ADC|GND.2 D1.2 | length 3.5
  Bottom Layer w0.254: D1.2@45.568,66.072 D1.2 48.99,66.072 ADC|GND.2@49.022,66.04
NetC5_2: C5.2 D2.7 E1.1 | length 12.9
  Top Layer w0.254: C5.2 24.384,26.924 24.892,27.432 E1.1 26.289,26.035 26.771,25.553 D2.7
NetC6_2: C6.2 D2.8 E1.2 | length 14
  Top Layer w0.254: C6.2@28.702,21.079 C6.2 26.673,21.079 26.289,21.463 E1.2 26.289,23.876 27.166,24.753 D2.8
NetD1_1: D1.1 R1.2 | length 10.8
  Top Layer w0.3: R1.2 v1(40.005,63.373)
  Bottom Layer w0.3: v1(40.005,63.373) 40.005,66.662 41.415,68.072 D1.1@45.568,68.072
NetD1_3: D1.3 R4.2 | length 5.5
  Top Layer w0.254: R4.2 v1(42.672,64.135)
  Bottom Layer w0.254: v1(42.672,64.135) 45.505,64.135 45.568,64.072 D1.3@45.25,63.754
NetD1_15: D1.15 T1.2 | length 5.3
  Bottom Layer w0.5: T1.2 30.72,54.028 D1.15@30.764,54.072
NetD1_17: D1.17 R2.1 | length 5.1
  Top Layer w0.254: v1(33.274,59.182) 34.798,59.182 R2.1
  Bottom Layer w0.254: D1.17@30.764,58.072 D1.17 32.926,58.072 33.274,58.42 v1(33.274,59.182)
NetD1_18: D1.18 R3.1 R5.1 | length 12.3
  Top Layer w0.254: v1(33.401,61.849) 34.798,61.849 R3.1
  Bottom Layer w0.254: R5.1 26.035,60.833 26.796,60.072 D1.18 32.767,60.072 33.401,60.706 v1(33.401,61.849)
NetD1_21: D1.21 RX|TX|-.2 | length 22.4
  Bottom Layer w0.254: RX|TX|-.2 14.732,72.644 15.24,72.136 15.24,67.945 17.113,66.072 D1.21@30.764,66.072
NetD1_22: D1.22 RX|TX|-.1 | length 23.5
  Bottom Layer w0.254: RX|TX|-.1 15.367,75.184 15.875,74.676 15.875,68.961 16.764,68.072 D1.22@30.764,68.072
NetD2_30: D2.30 R11.1 | length 18.3
  Top Layer w0.254: D2.30 54.597,27.953 54.864,27.686 v1(54.864,27.051) v1@54.61,27.051
  Bottom Layer w0.254: v1(54.864,27.051) 58.039,27.051 59.309,28.321 R11.1@59.309,32.385
NetD2_31: D2.31 R10.1 | length 13.4
  Top Layer w0.254: D2.31 53.391,28.753 53.594,28.956 v1(54.864,28.956)
  Bottom Layer w0.254: v1(54.864,28.956) 56.261,28.956 56.769,29.464 R10.1@56.769,32.385
NetD2_32: D2.32 R12.1 | length 10.4
  Top Layer w0.254: D2.32 52.451,29.591 53.975,29.591 54.61,30.226 v1(54.61,30.988)
  Bottom Layer w0.254: v1(54.61,30.988) R12.1
NetD2_33: D2.33 R13.1 | length 8.8
  Top Layer w0.254: D2.33 51.943,30.353 52.07,30.48 v1(52.07,32.353)
  Bottom Layer w0.254: v1(52.07,32.353) R13.1@52.07,33.782
NetD2_34: D2.34 R8.1 | length 6.2
  Top Layer w0.254: D2.34 44.775,33.853 45.466,34.544 v1(45.466,36.195)
  Bottom Layer w0.254: v1(45.466,36.195) 46.99,36.195 R8.1
NetD2_35: D2.35 R9.1 | length 5.4
  Top Layer w0.254: v1(43.942,35.941) 43.975,35.908 D2.35
  Bottom Layer w0.254: v1(43.942,35.941) R9.1
NetD2_36: D2.36 R14.1 | length 7.6
  Top Layer w0.254: v1(42.291,36.576) 42.291,35.687 43.175,34.803 D2.36
  Bottom Layer w0.254: R14.1 40.386,37.719 41.529,36.576 v1(42.291,36.576)
NetD2_37: D2.37 R7.2 | length 20.5
  Top Layer w0.254: v1(28.956,36.576) 30.353,36.576 31.75,37.973 40.513,37.973 41.148,37.338 41.148,35.052 42.375,33.825 D2.37
  Bottom Layer w0.254: R7.2 v1(28.956,36.576)
NetD4_3: D4.3 R27.2 | length 4.2
  Bottom Layer w0.254: R27.2 66.919,36.723 D4.3
NetD4_4: D4.4 R28.2 | length 4.2
  Bottom Layer w0.254: R28.2 68.834,39.319 68.88,39.273 D4.4
NetPROFILE_1: PROFILE.1 R26.2 | length 15.5
  Top Layer w0.254: v1(75.032,37.592) PROFILE.1
  Bottom Layer w0.254: R26.2 73.152,36.957 73.787,37.592 v1(75.032,37.592)
NetR5_2: R5.2 WIFI-PROG.1 | length 6.3
  Top Layer w0.254: v1(24.13,60.071) 24.13,60.833 24.384,61.087 WIFI-PROG.1
  Bottom Layer w0.254: v1@24.135,60.066 v1(24.13,60.071) 24.13,62.479 R5.2
NetR25_2: R25.2 T1.1 | length 2.1
  Bottom Layer w0.3: T1.1 25.527,51.181 25.532,51.176 R25.2
RXD: D2.9 R27.1 | length 71.3
  Top Layer w0.254: D2.9 32.889,23.953 30.861,21.925 30.861,13.633 34.842,9.652 55.194,9.652 61.011,15.469 61.011,24.079 63.195,26.264 v1(63.195,36.703)
  Bottom Layer w0.254: v1(63.195,36.703) R27.1
STUB-BIT-1: D1.4 R14.2 R16.1 | length 48.4
  Top Layer w0.254: v1(42.164,38.354) 51.562,38.354 51.689,38.227 53.213,39.751 53.213,46.482 52.197,47.498 v1(51.181,47.498) 51.181,52.197 53.34,54.356 v1(53.34,61.976)
  Bottom Layer w0.254: R14.2 41.534,40.127 42.164,39.497 v1(42.164,38.354) ; D1.4@45.568,62.072 45.664,61.976 v1(53.34,61.976) ; R16.1@51.181,46.355 v1(51.181,47.498)
STUB-BIT-2: D1.5 R9.2 R17.1 | length 41.3
  Top Layer w0.254: v1(40.767,47.117) 44.196,47.117 44.215,47.098 48.895,47.098 ; v1(48.895,46.228) 48.895,47.098 ; v1(51.816,60.071) 51.816,54.61 50.565,53.359 50.565,48.276 49.387,47.098 48.895,47.098
  Bottom Layer w0.254: v1(40.767,47.117) 40.767,42.667 42.032,41.402 43.053,41.402 43.942,40.513 R9.2 ; D1.5@45.568,60.072 v1(51.816,60.071) v1(51.816,60.071) ; R17.1 v1(48.895,46.228)
STUB-BIT-3: D1.6 R8.2 R18.1 | length 25
  Bottom Layer w0.254: D1.6@45.568,58.072 44.229,58.072 43.561,57.404 43.561,54.356 44.049,53.868 44.049,51.414 44.047,51.413 44.047,48.619 42.672,47.244 R18.1 44.069,46.101 44.577,45.593 44.577,40.684 46.912,38.349 R8.2
STUB-BIT-4: D1.7 R13.2 R19.1 | length 43.5
  Top Layer w0.254: v1(38.608,47.879) 39.116,47.879 39.135,47.898 46.209,47.898 v1(46.228,47.879)
  Bottom Layer w0.254: R19.1 v1(38.608,47.879) ; D1.7@45.903,56.407 45.568,56.072 D1.7 49.681,56.072 50.165,55.588 50.165,53.975 46.228,50.038 v1(46.228,47.879) 49.276,47.879 49.784,48.387 52.07,48.387 53.086,47.371 53.086,38.735 52.07,37.719 R13.2 R13.2@52.07,35.682
STUB-BIT-5: D1.16 R6.2 R12.2 R20.1 | length 51.9
  Top Layer w0.254: v1(36.195,49.022) v1(47.371,49.022)
  Bottom Layer w0.254: R6.2 28.067,56.642 28.637,56.072 D1.16 34.606,56.072 36.195,54.483 v1(36.195,49.022) 36.195,48.133 35.941,47.879 34.712,47.879 34.29,47.457 R20.1 ; v1(47.371,49.022) 52.578,49.022 54.61,46.99 R12.2
STUB-BIT-6: D1.19 R10.2 R21.1 | length 63.5
  Top Layer w0.254: v1@29.693,49.276 v1(29.591,49.378) 34.417,49.378 ; 39.867,50.055 39.903,50.019 48.749,50.019 v1(48.768,50.038) v1@48.641,50.165
  Top Layer w0.3: 34.417,49.378 35.077,50.038 v1(38.1,50.038) 38.117,50.055 39.867,50.055
  Bottom Layer w0.254: v1(29.591,49.378) 29.591,46.482 R21.1 ; v1(48.768,50.038) 48.841,50.111 53.013,50.111 57.15,45.974 57.15,34.666 R10.2@56.769,34.285
  Bottom Layer w0.3: D1.19@30.761,62.069 D1.19@30.764,62.072 ; D1.19 30.862,61.976 32.131,61.976 33.02,62.865 34.544,62.865 38.1,59.309 v1(38.1,50.038)
STUB-BIT-7: D1.20 R11.2 R22.1 | length 73
  Top Layer w0.254: v1(25.654,47.752) 27.051,47.752 27.813,48.514 27.813,49.784 28.848,50.819 40.24,50.819 v1(40.259,50.8) 46.99,50.8 47.879,51.689 v1(49.403,51.689)
  Bottom Layer w0.254: R22.1 v1(25.654,47.752) ; D1.20 36.385,64.072 40.259,60.198 v1(40.259,50.8) ; v1(49.403,51.689) 54.483,51.689 59.69,46.482 59.69,34.666 R11.2@59.309,34.285
pads on no net: D1.9 D1.10 D1.11 D1.12 D1.13 D1.14 D2.15 D2.16 D2.20 D2.25 D2.26 D4.1 D4.5 D4.6 ISP-PROGRAMMER.3 JTAG-DEBUUGER.7 JTAG-DEBUUGER.8 Logic1.9 Logic2.2 Logic2.4 Logic2.6 Logic2.8 Logic2.9 RESET.4

## Polygon pours and split planes (outlines as drawn)
GND on Bottom Layer "GND" (solid, remove dead copper, pour order 0): 0.762,0.762 0.635,38.862 0.635,76.835 90.17,76.835 90.297,0.762
GND on Top Layer "Top Layer-No Net" (solid, remove dead copper, pour order 2): 0.762,0.762 0.762,1.143 0.635,20.066 0.635,29.464 0.635,34.163 0.635,38.862 0.635,40.005 0.635,41.275 0.635,43.561 0.635,48.387 0.635,57.785 0.635,76.835 90.17,76.835 90.17,76.708 90.17,76.454 90.297,0.762

## Keep-outs
Keep-Out Layer:
  lines w0.1: 0,0 0,77.47 28.067,77.47 28.067,69.469 48.26,69.469 48.26,77.47 90.932,77.47 90.932,0.762 90.932,0 0.762,0 0,0

## Other copper
Top Layer:
  pour cut-out: 14.859,68.826 14.986,76.835 82.804,76.835 82.804,68.826 38.191,68.826
  text "Designed by:" at 63.246,72.967 h1.7
  text "Dodonov P.E." at 63.246,70.612 h1.7
Bottom Layer:
  rectangle net +3.3V: 39.497,25.146 42.545,27.686
  pour cut-out: 29.513,68.745 46.775,68.745 82.804,68.834 82.804,76.835 15.113,76.835 15.113,72.136 15.113,68.834

## Silkscreen, mask and mechanical layers (free items; w line width, h text height)
Top Overlay:
  lines w0.1: 23.749,37.338 23.749,40.386 ; 27.559,37.338 27.559,40.386 ; 32.131,37.338 32.131,40.386 ; 36.576,37.465 36.576,40.513 ; 40.767,37.465 40.767,40.513 ; 44.958,37.465 44.958,40.513 ; 49.022,37.465 49.022,40.513 ; 52.959,37.211 52.959,40.259
  lines w0.3: 23.749,37.338 52.832,37.338
  text "RX-RXD" at 17.272,74.803 h1.52
  text "TX-TXD" at 17.272,72.009 h1.52
  text "G-GND" at 18.796,69.469 h1.52
  text "code" at 24.511,45.72 h3
  text "GND" at 4.572,8.128 h1.52
Bottom Overlay:
  text "GND" at 89.916,63.5 h1.52
  text "+3.3" at 80.137,63.373 h1.52
  text "GND" at 1.905,61.722 h1.52
  text "GND" at 89.916,61.214 h1.52
  text "SEN" at 79.883,60.706 h1.52
  text "GND" at 2.032,59.182 h1.52
  text "SCK" at 15.875,59.182 h1.52
  text "GND" at 89.789,58.547 h1.52
  text "SDO/TXD" at 79.883,57.912 h1.52
  text "GND" at 2.159,56.769 h1.52
  text "RESET" at 18.923,56.642 h1.52
  text "GND" at 89.789,55.88 h1.52
  text "SDI" at 79.883,55.499 h1.52
  text "GND" at 2.032,54.356 h1.52
  text "RXD" at 89.916,53.34 h1.52
  text "SCK" at 80.137,52.959 h1.52
  text "+5" at 6.477,51.562 h1.52
  text "GND" at 5.969,38.989 h1.52
  text "TDI" at 15.748,38.989 h1.52
  text "RST" at 5.969,33.909 h1.52
  text "TMS" at 19.685,33.782 h1.52
  text "+3.3" at 6.223,31.242 h1.52
  text "TDO" at 16.51,30.988 h1.52
  text "GND" at 6.223,28.448 h1.52
  text "TCK" at 18.034,28.194 h1.52
  text "GND" at 79.629,23.114 h1.52
  text "SYNC" at 90.551,22.733 h1.52
  text "GND" at 79.502,20.32 h1.52
  text "SDO" at 89.535,20.066 h1.52
  text "RST-BUF" at 79.502,17.78 h1.52
  text "SDIO" at 90.424,17.526 h1.52
  text "UPDATE" at 79.375,15.24 h1.52
  text "SCLK" at 90.551,14.859 h1.52
  text "PROFILE" at 79.502,12.446 h1.52
  text "CSB" at 90.043,12.319 h1.52

## Text inside footprints (layer, text, board x,y; h text height)
D1: Bottom Overlay "ESP12" at 42.418,61.172 h2
D4: Bottom Overlay "USB-UART" at 74.17,38.923 h2 r180